# Altium PCB MODULAR_PCB.PcbDoc (part 2 of 2)
Units mil, origin at the board's own origin, x right, y up, seen from the top; angles counter-clockwise.
Board outline 3480 x 3849.93 mil, 2 copper layers (Top Layer, Bottom Layer); 170 components, 80 nets, 391 pads, 342 vias.
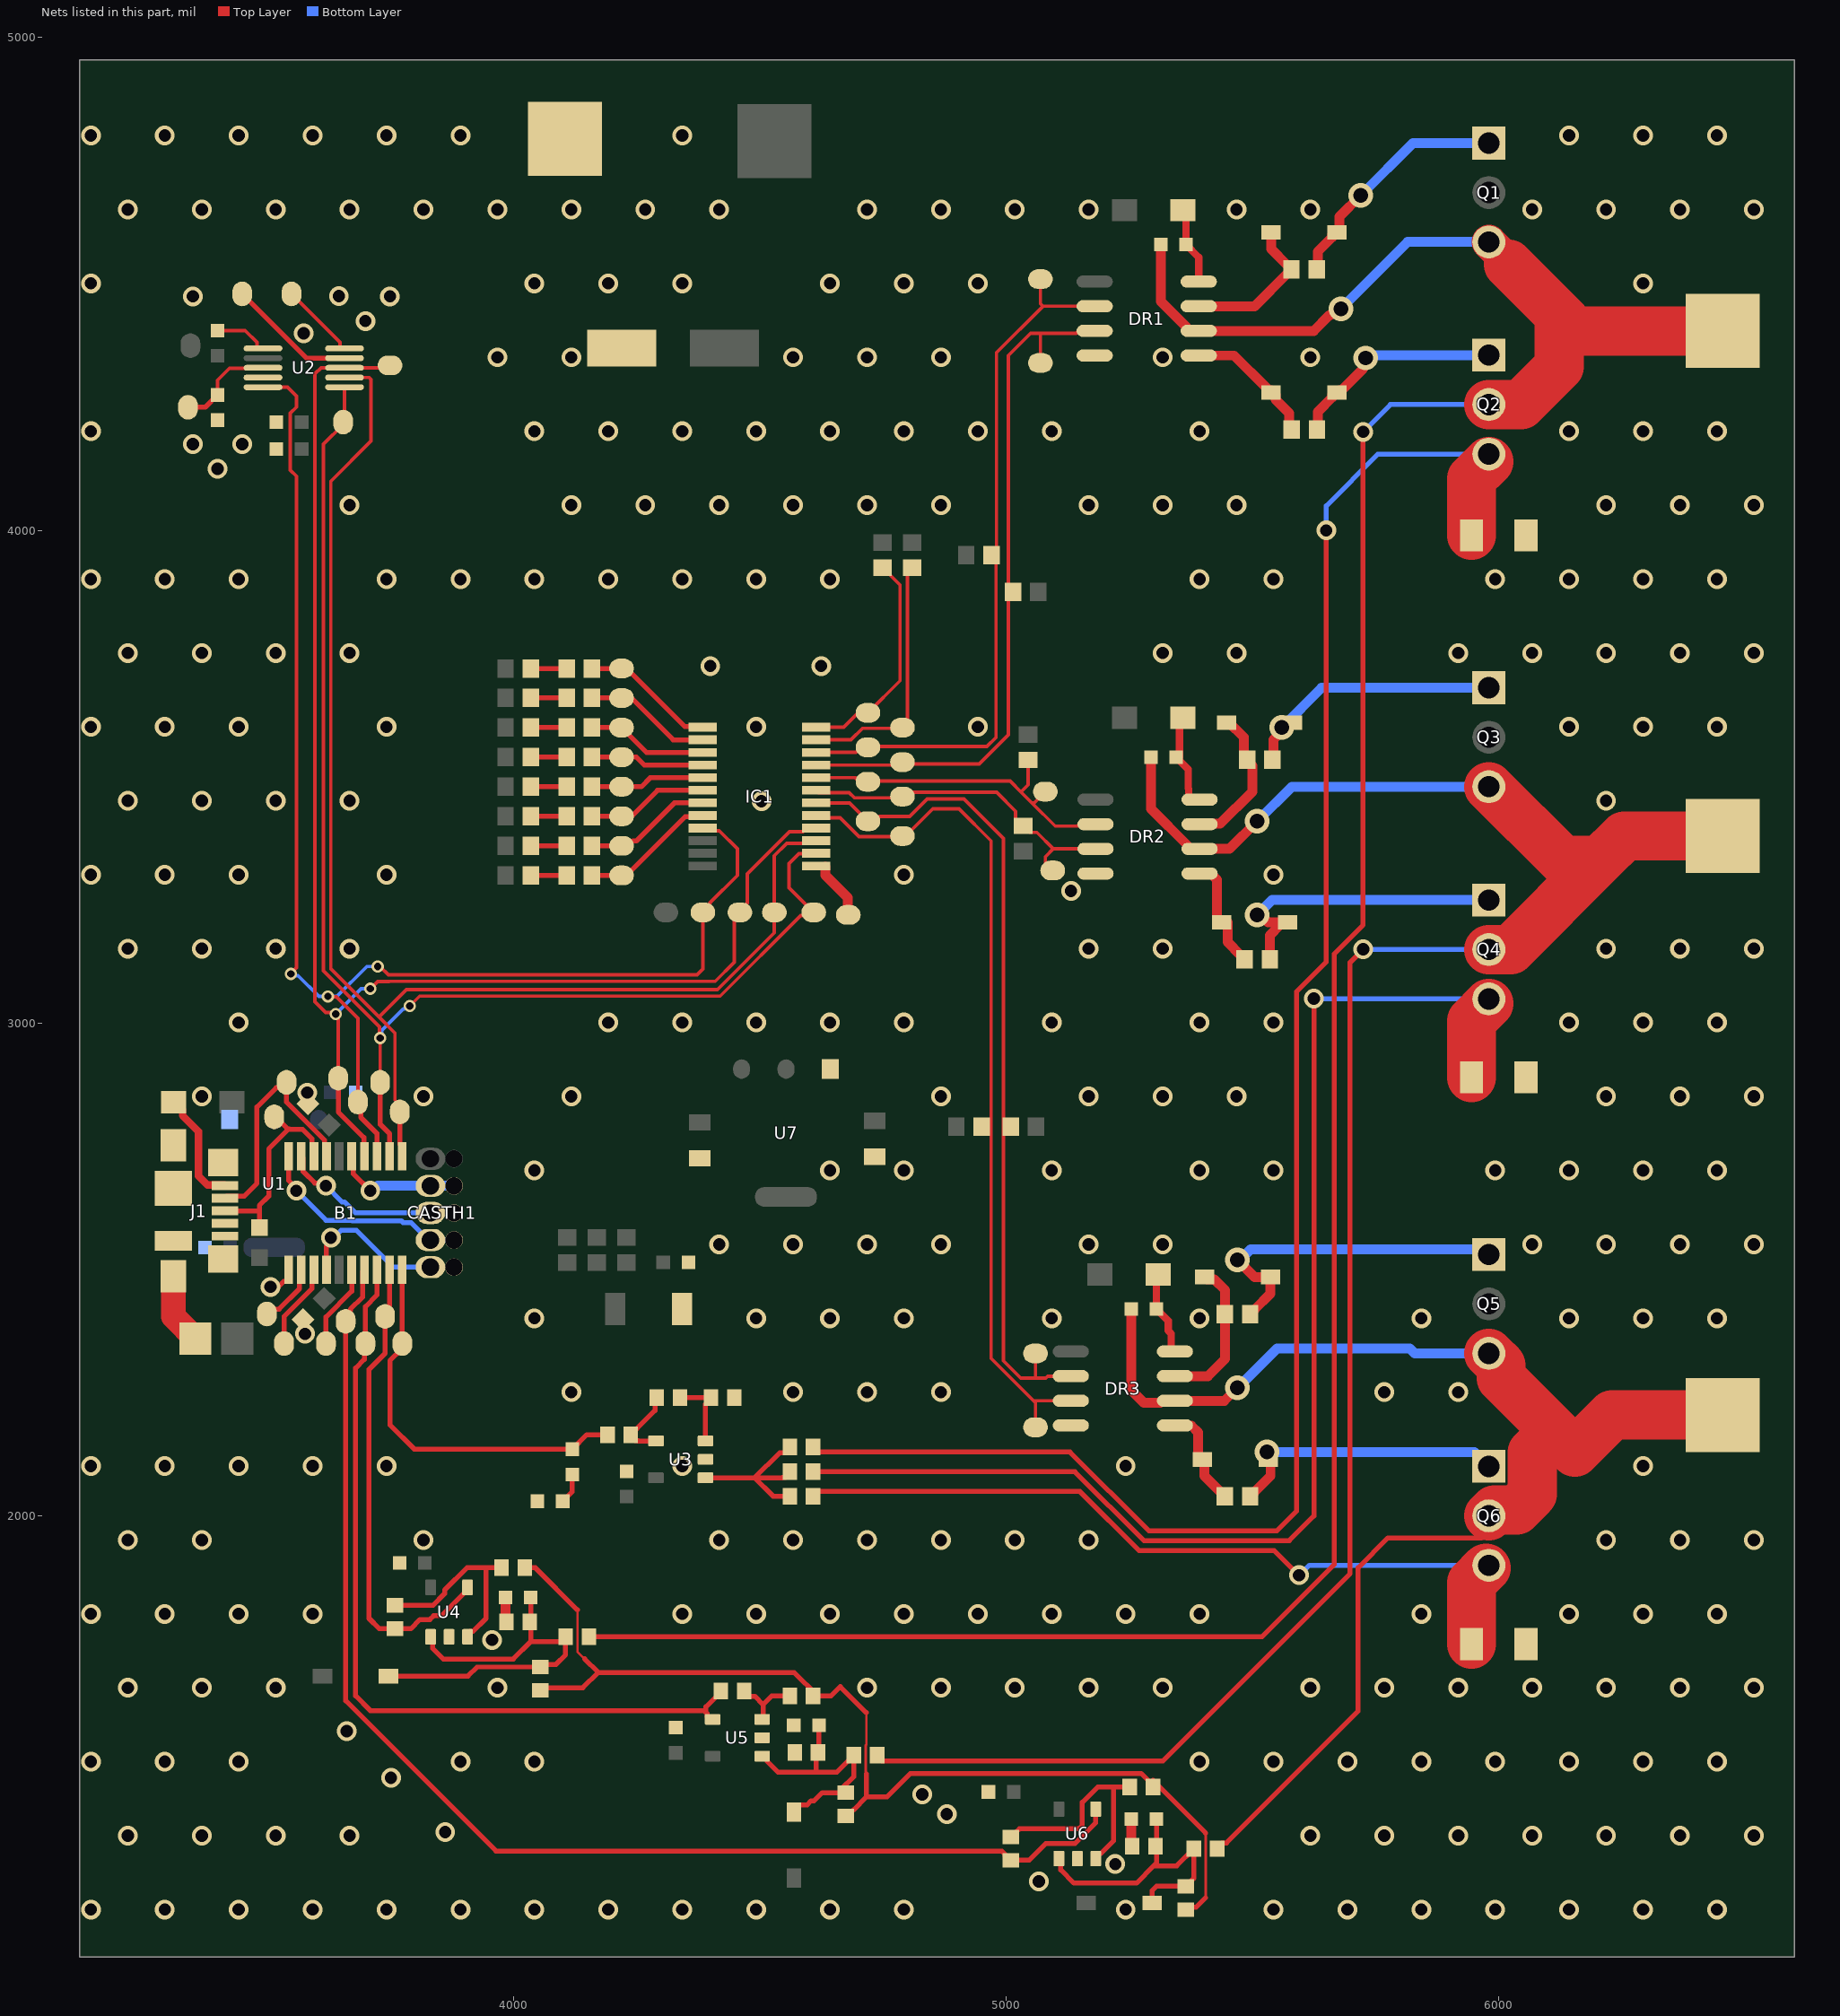
[diagram p2: the nets of this part, all layers, seen from the top]

## Via types
v1: diameter 40, hole 25, Top Layer to Bottom Layer, 300 vias
v2: diameter 50, hole 30, Top Layer to Bottom Layer, tented both sides, 22 vias
v3: diameter 40/40 (per signal layer), hole 25, Top Layer to Bottom Layer, tented both sides, 8 vias
v4: diameter 25/25 (per signal layer), hole 15, Top Layer to Bottom Layer, tented both sides, 7 vias
v5: diameter 40, hole 25, Top Layer to Bottom Layer, tented both sides, 5 vias

## Nets (pads, with @x,y where several pads share a name; then routed paths per layer and width w, separated by ;. In a path a pad name is that pad's centre, name@x,y a point inside that pad or via, vN(x,y) a via of type N, cw(c..) or ccw(c..) an arc to the next point about the centre after c; other vN are vias at no path point) (continued)
FSYNC: B1.14 IC1.4 TP8.1 TP16.1 TP47.1 U2.8 | length 3030
  Top Layer w7: v4@3636.29,3012.8 3640.56,3012.8 3645,3008.36 TP8.1@3645,2888.33 ; v4@3636.29,3015.05 v4(3639.74,3018.49) 3636.29,3021.94 3619.52,3021.94 3597.87,3043.59 3597.87,4317.87 3610,4330 TP16.1@3745,4330 ; v4(3710,3070) 3724.9,3084.9 3748,3084.9 3748.1,3085 4410,3085 4448.69,3123.69 4448.69,3213.69 TP47.1@4460,3225 4460,3228.93 4475,3243.93 4475,3303.38 4560.41,3388.79 4588.24,3388.79 4595.47,3396.02 IC1.4@4615.16,3396.02 ; TP16.1@3745,4330 TP16.1@3750,4335 TP16.1@3745,4330
  Top Layer w10: TP8.1@3645,2888.33 3645,2820 3697.01,2767.99 3697.01,2731.26 B1.14@3697.95,2730.32
  Bottom Layer w7: v4(3639.74,3018.49) 3691.36,3070.12 3709.88,3070.12 v4(3710,3070)
GND: B1.1 B1.15 C1.1 C2.1 C3.2 C4.2 C6.1 C7.2 C8.1 C9.1 C13.2 C15.1 C16.1 C17.2 C18.1 C19.2 C20.1 C21.2 C22.1 C23.1 C24.1 CASTH1.4 CP2.1 D3.1 DR1.4 DR2.4 DR3.4 IC1.1 J1.4 J1.5 J1.6 J1.7 J1.8 J1.9 J1.10 J1.11 R7.1 R26.1 R29.1 R30.2 R37.1 R41.1 R45.1 S_PAD2.1 TP19.1 TP20.1 U1.1 U2.4 U2.9 U3.2 U4.2 U5.2 U6.2 U7.1 | length 953.8
  Top Layer w10: TP20.1@3450,4480 3580.31,4349.69 U2.9@3657.68,4349.69 ; v3(3507.36,2465) 3509.19,2466.83 3524.94,2466.83 3534.57,2476.46 3540.55,2476.46 3544.41,2480.32 B1.1@3544.41,2500 ; B1.15@3672.36,2730.32 3675.33,2727.35 3675.33,2694.67 v3(3710,2660)
  Top Layer w20: C16.1@3984.41,1835 3984.41,1786.97 R37.1@3986.38,1785 ; IC1.1@4633.7,3318.11 4633.7,3300.71 4679.35,3255.06 4679.35,3220.65 TP19.1@4680,3220 ; C20.1@5254.41,1385 5254.41,1331.97 R45.1@5256.38,1330
  Top Layer w50: J1.11@3310.28,2486.54 3310.28,2404.72 CP2.1@3355,2360
  Bottom Layer w20: v3(3710,2660) 3715.41,2660 3725.41,2670 3845,2670 CASTH1.4@3880,2670
  other v1: 3143,1201.37 3293,1201.37 3443,1201.37 3593,1201.37 3743,1201.37 3893,1201.37 4043,1201.37 4193,1201.37 4343,1201.37 4493,1201.37 4643,1201.37 4793,1201.37 5243,1201.37 5543,1201.37 5693,1201.37 5843,1201.37 5993,1201.37 6143,1201.37 6293,1201.37 6443,1201.37 5067,1258.63 5222,1293.63 3218,1351.37 3368,1351.37 3518,1351.37 3668,1351.37 5618,1351.37 5768,1351.37 5918,1351.37 6068,1351.37 6218,1351.37 6368,1351.37 6518,1351.37 3862,1358.63 4880,1395 4830,1435 3752,1468.63 3143,1501.37 3293,1501.37 3443,1501.37 3893,1501.37 4043,1501.37 5393,1501.37 5543,1501.37 5693,1501.37 5843,1501.37 5993,1501.37 6143,1501.37 6293,1501.37 6443,1501.37 3662,1563.63 3218,1651.37 3368,1651.37 3518,1651.37 3968,1651.37 4718,1651.37 4868,1651.37 5018,1651.37 5168,1651.37 5318,1651.37 5618,1651.37 5768,1651.37 5918,1651.37 6068,1651.37 6218,1651.37 6368,1651.37 6518,1651.37 3957,1748.63 3143,1801.37 3293,1801.37 3443,1801.37 3593,1801.37 4343,1801.37 4493,1801.37 4643,1801.37 4793,1801.37 4943,1801.37 5093,1801.37 5243,1801.37 5393,1801.37 5843,1801.37 6143,1801.37 6293,1801.37 6443,1801.37 3218,1951.37 3368,1951.37 3818,1951.37 4418,1951.37 4568,1951.37 4718,1951.37 4868,1951.37 5018,1951.37 5168,1951.37 6218,1951.37 6368,1951.37 6518,1951.37 3143,2101.37 3293,2101.37 3443,2101.37 3593,2101.37 3743,2101.37 4343,2101.37 5243,2101.37 6293,2101.37 4118,2251.37 4568,2251.37 4718,2251.37 4868,2251.37 5768,2251.37 5918,2251.37 4043,2401.37 4493,2401.37 4643,2401.37 4793,2401.37 5093,2401.37 5393,2401.37 5843,2401.37 6143,2401.37 6293,2401.37 6443,2401.37 4418,2551.37 4568,2551.37 4718,2551.37 4868,2551.37 5168,2551.37 5318,2551.37 6068,2551.37 6218,2551.37 6368,2551.37 6518,2551.37 4043,2701.37 4643,2701.37 4793,2701.37 5093,2701.37 5393,2701.37 5543,2701.37 5993,2701.37 6143,2701.37 6293,2701.37 6443,2701.37 3368,2851.37 3818,2851.37 4118,2851.37 4868,2851.37 5168,2851.37 5318,2851.37 5468,2851.37 6218,2851.37 6368,2851.37 6518,2851.37 3443,3001.37 4193,3001.37 4343,3001.37 4493,3001.37 4643,3001.37 4793,3001.37 5093,3001.37 5393,3001.37 5543,3001.37 6143,3001.37 6293,3001.37 6443,3001.37 3218,3151.37 3368,3151.37 3518,3151.37 3668,3151.37 5168,3151.37 5318,3151.37 6218,3151.37 6368,3151.37 6518,3151.37 5132,3268.63 3143,3301.37 3293,3301.37 3443,3301.37 3743,3301.37 4793,3301.37 5543,3301.37 3218,3451.37 3368,3451.37 3518,3451.37 3668,3451.37 4503.88,3450.78 6218,3451.37 3143,3601.37 3293,3601.37 3443,3601.37 3743,3601.37 4493,3601.37 4943,3601.37 6143,3601.37 6293,3601.37 6443,3601.37 4400,3725 4625,3725 3218,3751.37 3368,3751.37 3518,3751.37 3668,3751.37 5318,3751.37 5468,3751.37 5918,3751.37 6068,3751.37 6218,3751.37 6368,3751.37 6518,3751.37 3143,3901.37 3293,3901.37 3443,3901.37 3743,3901.37 3893,3901.37 4043,3901.37 4193,3901.37 4343,3901.37 4493,3901.37 4643,3901.37 5393,3901.37 5543,3901.37 5993,3901.37 6143,3901.37 6293,3901.37 6443,3901.37 3668,4051.37 4118,4051.37 4268,4051.37 4418,4051.37 4568,4051.37 4718,4051.37 4868,4051.37 5168,4051.37 5318,4051.37 5468,4051.37 6218,4051.37 6368,4051.37 6518,4051.37 3400,4125 3350,4175 3450,4175 3143,4201.37 4043,4201.37 4193,4201.37 4343,4201.37 4493,4201.37 4643,4201.37 4793,4201.37 4943,4201.37 5093,4201.37 5393,4201.37 6143,4201.37 6293,4201.37 6443,4201.37 3968,4351.37 4118,4351.37 4568,4351.37 4718,4351.37 4868,4351.37 5318,4351.37 5618,4351.37 3575,4400 3700,4425 3350,4475 3750,4475 3646.25,4475.74 3143,4501.37 4043,4501.37 4193,4501.37 4343,4501.37 4643,4501.37 4793,4501.37 4943,4501.37 6293,4501.37 3218,4651.37 3368,4651.37 3518,4651.37 3668,4651.37 3818,4651.37 3968,4651.37 4118,4651.37 4268,4651.37 4418,4651.37 4718,4651.37 4868,4651.37 5018,4651.37 5168,4651.37 5468,4651.37 5618,4651.37 6068,4651.37 6218,4651.37 6368,4651.37 6518,4651.37 3143,4801.37 3293,4801.37 3443,4801.37 3593,4801.37 3743,4801.37 3893,4801.37 4343,4801.37 6143,4801.37 6293,4801.37 6443,4801.37
  other v3: 3577.5,2369.79 3582.18,2859.31
MCLK: B1.13 IC1.21 TP10.1 TP21.1 U2.5 | length 2890.4
  Top Layer w7: U2.5@3492.32,4290.63 3541.8,4290.63 3560,4272.43 3560,4250.4 3547.31,4237.71 3547.31,4122.69 3560,4110 3560,3113.1 3549,3102.1 v4(3549,3100) ; v4(3623.87,3054.36) 3624.75,3053.48 3641.52,3053.48 3685,3010 TP10.1@3685,2840 ; v4(3725,3115) 3729.87,3115 3746.87,3098 4373,3098 4385,3110 4385,3228.93 4399.57,3243.5 4399.57,3244.57 4455,3300 4455,3353.94 4418.15,3390.79 4390.07,3390.79 IC1.21@4384.84,3396.02
  Top Layer w10: TP10.1@3685,2840 3690.74,2834.26 3690.74,2809.26 3723.54,2776.46 B1.13@3723.54,2730.32
  Bottom Layer w7: v4(3549,3100) 3552.44,3096.56 3563.44,3096.56 3605.49,3054.51 3623.72,3054.51 v4(3623.87,3054.36) 3642.4,3054.36 3703.04,3115 v4(3725,3115)
NetB1_2: B1.2 TP1.1 | length 126.9
  Top Layer w10: TP1.1@3500.86,2410 3510.61,2419.75 3524.75,2419.75 3566.14,2461.14 3566.14,2496.14 B1.2@3570,2500
NetB1_3: B1.3 TP2.1 | length 175.1
  Top Layer w10: TP2.1@3535,2350 3535,2405 3591.73,2461.73 3591.73,2496.14 B1.3@3595.59,2500
NetB1_6: B1.6 TP4.1 | length 171.7
  Top Layer w10: TP4.1@3620,2350 3620,2403.84 3672.36,2456.2 B1.6@3672.36,2500
NetB1_7: B1.7 R47.2 TP6.1 U6.4 | length 2609.6
  Top Layer w10: B1.7@3697.95,2500 3694.09,2496.14 3694.09,2444.09 3669.75,2419.75 3669.75,2417.87 3660,2408.12 TP6.1@3660,2395 3660,1625 3965,1320 4991.38,1320 4998.27,1313.11 4998.27,1311.14 R47.2@5008.03,1301.38 ; R47.2@5010,1301.38 R47.2@5008.03,1301.38 ; U6.4@5182.4,1405.2 5182.4,1377.4 5140,1335 5080.87,1335 5047.24,1301.38 R47.2@5008.03,1301.38
NetB1_8: B1.8 R43.2 TP7.1 U5.4 | length 1690.6
  Top Layer w10: B1.8@3723.54,2500 3723.54,2448.54 3700,2425 TP7.1@3700,2350 3697.75,2347.75 3697.75,2317.75 3680,2300 3680,1635 3710,1605 4388.2,1605 4394.06,1599.14 ; U5.4@4404.8,1587.4 4399.88,1587.4 4394.06,1593.23 4394.06,1598.15 4391.13,1601.08 4391.13,1612.78 4421.38,1643.03 R43.2@4421.38,1645
NetB1_9: B1.9 R39.2 TP9.1 U4.4 | length 971.4
  Top Layer w10: B1.9@3749.13,2500 3749.13,2427.25 3740,2418.12 TP9.1@3740,2405 3740,2330 3707.27,2297.27 3707.27,1792.38 3728.27,1771.38 3792.06,1771.38 3810.7,1790.01 3831.03,1790.01 3838.57,1797.55 3854.68,1797.55 3907.4,1850.28 U4.4@3907.4,1855.2
NetB1_10: B1.10 C14.2 R34.2 TP11.1 | length 799.5
  Top Layer w10: B1.10@3774.72,2500 3774.72,2447.7 3775,2447.43 3775,2340 3750,2315 3750,2185 3799.41,2135.59 C14.2@4120,2135.59 4149.41,2165 R34.2@4191.38,2165
NetB1_17: B1.17 J1.2 TP5.1 | length 496.4
  Top Layer w10: J1.2@3415,2645 3418.86,2648.86 3453.86,2648.86 3480,2675 3480,2830 3519.26,2869.26 3529.26,2869.26 TP5.1@3540,2880 3540,2840 3617.32,2762.68 3617.32,2734.17 B1.17@3621.18,2730.32
NetB1_18: B1.18 J1.3 R1.1 TP3.1 | length 421
  Top Layer w10: J1.3@3415.87,2618.54 3485,2618.54 ; R1.1@3485,2585.51 3485,2618.54 ; TP3.1@3515,2810 3517.86,2810 3541.05,2786.81 ; 3544.82,2785.81 3504.03,2745.01 3504.03,2649.03 3485,2630 3485,2618.54 ; 3545.53,2785.1 3572.27,2785.1 3592.02,2765.36 3592.02,2733.89 B1.18@3595.59,2730.32
NetB1_19: B1.19 CASTH1.3 | length 325.8
  Top Layer w10: B1.19@3570,2730.32 3573.86,2726.46 3573.86,2699.09 3597.21,2675.74 3614.26,2675.74 v3(3620,2670)
  Bottom Layer w10: v3(3620,2670) 3652.4,2637.6 3657.4,2637.6 3680,2615 CASTH1.3@3832,2615
NetB1_20: B1.20 CASTH1.2 | length 438.2
  Top Layer w10: B1.20@3544.41,2730.32 3544.41,2680.86 3560,2665.27 v3(3560,2660)
  Bottom Layer w10: v3(3560,2660) 3620,2600 3672.37,2600 3673.37,2599 3772.8,2599 3776.8,2595 3793.03,2595 3828.03,2560 CASTH1.2@3832,2560 CASTH1.2@3880,2560
NetC5_1: C5.1 U2.1 | length 113.2
  Top Layer w7: C5.1@3400,4405.59 3456.1,4405.59 3480.02,4381.68 3480.02,4371.59 3482.24,4369.37 U2.1@3492.32,4369.37
NetC8_2: C8.2 TP22.1 U2.3 | length 203
  Top Layer w7: C8.2@3400,4275 3400,4305 3424.08,4329.08 3491.4,4329.08 U2.3@3492.32,4330
  Top Layer w10: TP22.1@3340,4250 3375,4250 C8.2@3400,4275
NetC10_2: C10.2 D5.2 DR1.8 | length 158.3
  Top Layer w15: D5.2@5359.06,4650 5365.59,4643.46 C10.2@5365.59,4580 5391.22,4554.37 DR1.8@5391.22,4505
NetC11_1: C11.1 D7.2 DR2.8 | length 198.7
  Top Layer w15: C11.1@5345.59,3540 5370,3515.59 5370,3476.81 5371.1,3475.71 5371.1,3458.41 5375.63,3453.88 DR2.8@5392.93,3453.88 ; C11.1@5352.13,3540 5352.13,3613.08 D7.2@5359.06,3620
NetC12_2: C12.2 D17.2 DR3.8 | length 174.7
  Top Layer w15: D17.2@5309.06,2490 5305.59,2486.54 C12.2@5305.59,2420 5329.37,2396.22 5329.37,2376.22 5335.58,2370.01 5335.58,2360.01 5335.6,2338.41 5340.12,2333.88 DR3.8@5342.93,2333.88
NetC14_1: C14.1 C15.2 | length 62.4
  Top Layer w10: C15.2@4100.59,2030 4120,2049.41 C14.1@4120,2084.41
NetC16_2: C16.2 D20.1 R36.2 R37.2 R50.2 U4.1 | length 828.8
  Top Layer w10: D20.1@3746.93,1675 3908.13,1675 3926.75,1693.62 R50.2@4055,1693.62 4060,1698.62 4086.73,1698.62 4106.38,1718.27 R36.2@4106.38,1755 4106.38,1754.76 4096.61,1745 4035,1745 ; U4.1@3832.6,1754.8 3836.25,1751.15 3836.25,1731.81 3858.06,1710 4000,1710 4035,1745 ; R37.2@4033.62,1785 R37.2@4035.59,1785 ; C16.2@4035.59,1835 R37.2@4035.59,1785 ; 4035,1745 4035.59,1745.59 R37.2@4035.59,1785
NetC18_2: C18.2 D21.1 R40.2 R41.2 R49.2 U5.1 | length 516.2
  Top Layer w10: U5.1@4505.2,1512.6 4510.12,1512.6 4515.94,1506.77 4515.94,1501.85 4537.8,1480 4615,1480 ; D21.1@4570,1398.86 4570,1403.78 4579.76,1413.54 4596.38,1413.54 4604.76,1421.93 4610.55,1421.93 4627.24,1438.62 4663.27,1438.62 4665.83,1441.18 4665.83,1445.83 4691.38,1471.38 R40.2@4691.38,1515 4691.38,1513.03 4681.61,1503.27 4679.65,1503.27 4656.38,1480 4615,1480 ; C18.2@4620.59,1575 4620.59,1521.97 R41.2@4618.62,1520 4615,1516.38 4615,1480
NetC20_2: C20.2 D22.1 R44.2 R45.2 R48.2 U6.1 | length 613
  Top Layer w10: U6.1@5107.6,1304.8 5111.25,1301.15 5111.25,1281.81 5138.06,1255 5265,1255 5300,1290 ; D22.1@5296.93,1215 5296.93,1240 5305.55,1248.62 R48.2@5365,1248.62 5366.97,1248.62 5376.73,1258.39 5376.73,1260.35 5381.38,1265 R44.2@5381.38,1325 5346.38,1290 5300,1290 ; C20.2@5305.59,1385 5305.59,1330 5305.59,1295.59 5300,1290
NetD1_1: D1.1 J1.1 | length 234.3
  Top Layer w15: D1.1@3310.94,2840 3313.9,2840 3329.04,2824.86 3329.04,2812.81 3361.18,2780.67 3361.18,2690.16 3379.39,2671.95 3413.64,2671.95 J1.1@3415,2670.59
NetD2_1: D2.1 Q1.1 R5.2 | length 494
  Top Layer w20: R5.2@5630.59,4530 5632.69,4532.1 5632.69,4565.76 5662.24,4595.31 5662.24,4600.24 5667.01,4605 D2.1@5671.93,4605 5672.14,4605 5676.9,4609.76 5676.9,4636.9 v2(5720,4680)
  Bottom Layer w20: v2(5720,4680) 5826.18,4786.18 Q1.1@5980,4786.18
NetD2_2: D2.2 DR1.7 R5.1 | length 300.2
  Top Layer w20: DR1.7@5391.22,4455 5504.41,4455 R5.1@5570.71,4521.3 ; D2.2@5538.07,4605 5538.07,4571.34 5570.71,4538.7 5572.68,4538.7 5579.41,4531.97 R5.1@5579.41,4530
NetD4_1: D4.1 Q2.1 R6.2 | length 450.8
  Top Layer w20: R6.2@5631.18,4205 5632.98,4206.8 5632.98,4241.06 5662.24,4270.31 5662.24,4275.24 5667.01,4280 D4.1@5671.93,4280 5676.69,4284.76 D4.1@5681.61,4284.76 ; D4.1@5676.85,4280 D4.1@5681.61,4284.76 ; v2(5730,4350) 5724.26,4344.26 5724.26,4327.41 D4.1@5681.61,4284.76
  Bottom Layer w20: v2(5730,4350) 5735.79,4355.79 Q2.1@5980,4355.79
NetD4_2: D4.2 DR1.5 R6.1 | length 276.1
  Top Layer w20: DR1.5@5391.22,4355 5463.07,4355 5528.39,4289.69 5528.39,4284.76 5538.23,4284.76 5547.76,4275.24 5547.76,4265.39 5575.15,4238 5575.15,4209.85 R6.1@5580,4205
NetD6_1: D6.1 Q3.1 R8.2 | length 548.5
  Top Layer w20: R8.2@5540.59,3535 5542.69,3537.1 5542.69,3575.68 5563.5,3596.5 5577.01,3610 D6.1@5581.93,3610
  Bottom Layer w20: v2(5560,3600) 5640.79,3680.79 Q3.1@5980,3680.79
NetD6_2: D6.2 DR2.7 R8.1 | length 298.8
  Top Layer w20: DR2.7@5392.93,3403.88 5393.85,3404.8 5434.8,3404.8 5500,3470 5500,3522.44 5489.41,3533.03 R8.1@5489.41,3535 5482.68,3541.73 5482.68,3580.32 5452.99,3610 D6.2@5448.07,3610
NetD8_1: D8.1 Q4.1 R17.2 | length 629.7
  Top Layer w20: v2(5510,3220) 5517.24,3220 5532.24,3205 D8.1@5571.93,3205 ; R17.2@5535.59,3130 5535.59,3178.7 D8.1@5557.13,3200.24
  Bottom Layer w20: v2(5510,3220) 5540,3250 Q4.1@5980,3250
NetD8_2: D8.2 DR2.5 R17.1 | length 236.3
  Top Layer w20: DR2.5@5392.93,3303.88 5415.94,3303.88 5428.39,3291.44 5428.39,3209.76 5433.15,3205 5450,3205 5450,3164.41 5475.71,3138.7 5477.68,3138.7 5484.41,3131.97 R17.1@5484.41,3130
NetD9_1: D9.1 R9.1 | length 73.2
  Top Layer w10: R9.1@4035.59,3300 D9.1@4108.82,3300
NetD9_2: D9.2 IC1.20 TP28.1 | length 275.2
  Top Layer w10: D9.2@4160,3300 4230,3300 4348.92,3418.92 4382.15,3418.92 IC1.20@4384.84,3421.61
NetD10_1: D10.1 R10.1 | length 73.2
  Top Layer w10: R10.1@4035.59,3360 D10.1@4108.82,3360
NetD10_2: D10.2 IC1.19 TP30.1 | length 261
  Top Layer w10: D10.2@4160,3360 4233.12,3360 4243.12,3370 4250,3370 4327.2,3447.2 IC1.19@4384.84,3447.2
NetD11_1: D11.1 R11.1 | length 73.2
  Top Layer w10: R11.1@4035.59,3420 D11.1@4108.82,3420
NetD11_2: D11.2 IC1.18 TP32.1 | length 246.7
  Top Layer w10: D11.2@4160,3420 4240,3420 4292.8,3472.8 IC1.18@4384.84,3472.8
NetD12_1: D12.1 R12.1 | length 73.2
  Top Layer w10: R12.1@4035.59,3480 D12.1@4108.82,3480
NetD12_2: D12.2 IC1.17 TP34.1 | length 232.5
  Top Layer w10: D12.2@4160,3480 4260,3480 4278.39,3498.39 IC1.17@4384.84,3498.39
NetD13_1: D13.1 R13.1 | length 73.2
  Top Layer w10: R13.1@4035.59,3540 D13.1@4108.82,3540
NetD13_2: D13.2 IC1.16 TP37.1 | length 231.5
  Top Layer w10: D13.2@4160,3540 4250,3540 4266.02,3523.98 IC1.16@4384.84,3523.98
NetD14_1: D14.1 R14.1 | length 73.2
  Top Layer w10: R14.1@4035.59,3600 D14.1@4108.82,3600
NetD14_2: D14.2 IC1.15 TP40.1 | length 245.7
  Top Layer w10: D14.2@4160,3600 TP40.1@4220,3600 4270.43,3549.57 IC1.15@4384.84,3549.57
NetD15_1: D15.1 R15.1 | length 73.2
  Top Layer w10: R15.1@4035.59,3660 D15.1@4108.82,3660
NetD15_2: D15.2 IC1.14 TP42.1 | length 260
  Top Layer w10: D15.2@4160,3660 4240,3660 4324.84,3575.16 IC1.14@4384.84,3575.16
NetD16_1: D16.1 R16.1 | length 73.2
  Top Layer w10: R16.1@4035.59,3720 D16.1@4108.82,3720
NetD16_2: D16.2 IC1.13 TP44.1 | length 274.2
  Top Layer w10: D16.2@4160,3720 4230,3720 4347.74,3602.26 4383.33,3602.26 IC1.13@4384.84,3600.75
NetD18_1: D18.1 Q5.1 R27.2 | length 697.5
  Top Layer w20: v2(5470,2520) 5505,2485 D18.1@5536.93,2485 5536.93,2451.34 5504.29,2418.7 5502.32,2418.7 5495.59,2411.97 R27.2@5495.59,2410
  Bottom Layer w20: v2(5470,2520) 5475.93,2520 5496.72,2540.79 5970,2540.79 Q5.1@5980,2530.79
NetD18_2: D18.2 DR3.7 R27.1 | length 308.2
  Top Layer w20: DR3.7@5342.93,2283.88 5409.65,2283.88 5444.41,2318.64 5444.41,2458.7 5422.87,2480.24 5407.83,2480.24 D18.2@5403.07,2485
NetD19_1: D19.1 Q6.1 R28.2 | length 556.8
  Top Layer w20: R28.2@5495.59,2040 5495.59,2041.97 5502.32,2048.7 5504.29,2048.7 5537.02,2081.43 5537.02,2109.98 D19.1@5532.53,2114.48
  Bottom Layer w20: v2(5530,2130) 5950.79,2130 Q6.1@5980,2100.79
NetD19_2: D19.2 DR3.5 R28.1 | length 208.7
  Top Layer w20: DR3.5@5342.93,2183.88 5343.85,2182.96 5376.8,2182.96 5390,2169.76 5390,2119.24 5394.76,2114.48 D19.2@5398.67,2114.48 5402.74,2110.41 5402.74,2081.67 5435.71,2048.7 5437.68,2048.7 5444.41,2041.97 R28.1@5444.41,2040
NetIC1_11: IC1.11 R24.1 TP41.1 | length 517.8
  Top Layer w7: IC1.11@4615.16,3575.16 4685.61,3575.16 4708.95,3598.5 4788.5,3598.5 4800,3610 4800,3914.41 R24.1@4810,3924.41
NetIC1_12: IC1.12 R25.1 TP43.1 | length 432.8
  Top Layer w7: IC1.12@4615.16,3600.75 4670.75,3600.75 TP43.1@4700,3630 ; TP43.1@4720,3630 4785,3695 4785,3889.41 R25.1@4750,3924.41
NetQ2_3: Q2.3 R7.2 R32.1 | length 3671.4
  Top Layer w10: R32.1@4608.62,2140 4608.62,2139.76 4618.39,2130 5130,2130 5290,1970 5550,1970 5590,2010 5590,3064.5 5650,3124.5 v5(5650,4000)
  Top Layer w100: R7.2@5944.88,3990 5944.88,4104.88 Q2.3@5980,4140
  Bottom Layer w10: v5(5650,4000) 5650,4050 5755,4155 Q2.3@5980,4155
NetQ4_3: Q4.3 R26.2 R33.1 | length 2666.9
  Top Layer w10: R33.1@4608.62,2090 5140,2090 5280,1950 5575,1950 5625,2000 v5@5625,3045.32 ; v5(5625,3050) v5@5629.68,3045.32
  Top Layer w100: R26.2@5944.88,2890 5944.88,3004.88 Q4.3@5980,3040
  Bottom Layer w10: v5(5625,3050) 5625.79,3049.21 Q4.3@5980,3049.21
NetQ6_3: Q6.3 R29.2 R35.1 | length 1621
  Top Layer w10: R35.1@4608.62,2040 4608.62,2040.24 4618.39,2050 5150,2050 5270,1930 5544.14,1930 5594.14,1880 v5(5595,1880)
  Top Layer w100: R29.2@5944.88,1740 5944.88,1864.88 Q6.3@5974.39,1894.39
  Bottom Layer w10: v5(5595,1880) 5595.86,1880 5615.86,1900 Q6.3@5980,1900
NetR30_1: R30.1 R31.1 U3.3 | length 155
  Top Layer w10: R31.1@4338.62,2240 R30.1@4401.38,2240 4401.38,2238.03 4390.2,2226.85 U3.3@4390.2,2152.4
NetR31_2: R31.2 R34.1 U3.4 | length 155.6
  Top Layer w10: U3.4@4289.8,2152.4 4254.24,2152.4 4253.38,2153.27 4248.39,2153.27 4238.62,2163.03 R34.1@4238.62,2165 4238.62,2166.97 4248.39,2176.73 4250.35,2176.73 4287.75,2214.13 4287.75,2236.37 R31.2@4291.38,2240
NetR32_2: R32.2 R33.2 R35.2 U3.1 | length 362.8
  Top Layer w10: U3.1@4390.2,2077.6 4490,2077.6 ; R35.2@4561.38,2040 4527.6,2040 4490,2077.6 ; R33.2@4561.38,2090 4561.38,2088.03 4551.61,2078.27 4546.43,2078.27 4545.76,2077.6 4490,2077.6 ; R32.2@4561.38,2140 4561.38,2138.03 4551.61,2128.27 4540.67,2128.27 4490,2077.6
NetR38_1: R38.1 R42.1 R46.1 R48.1 R49.1 R50.1 | length 2243.4
  Top Layer w5: 4130.36,1809.64 4130.36,1724.64 4144.95,1710.05 ; R49.1@4675,1391.38 4687.26,1403.64 R49.1@4690.61,1403.64 ; 4716.77,1476.77 4715.36,1478.18 4715.36,1535.25 4716.77,1536.67 4716.77,1600.93 ; 5286.36,1467.08 5286.36,1464.23 5287.15,1463.44 5298.62,1463.44 R46.1@5298.62,1450 ; R48.1@5365,1201.38 5369.65,1196.72 5371.38,1195 5371.38,1198.45 R48.1@5379.23,1206.3 ; 5405.36,1225.36 5405.36,1356.7 ; R42.1@4608.62,1635 4618.62,1625 R42.1@4608.62,1635
  Top Layer w10: R38.1@4023.62,1895 4045,1895 4130.36,1809.64 ; R50.1@4055,1646.38 4060,1651.38 4141.38,1651.38 4172.5,1682.5 ; 4144.95,1710.05 4172.5,1682.5 ; R42.1@4608.62,1635 R42.1@4617.7,1635 ; R49.1@4690.61,1403.64 4716.77,1429.8 ; 4716.77,1476.77 4716.77,1429.8 ; 4716.77,1600.93 4663.85,1653.85 4645,1635 4631.35,1635 R42.1@4617.7,1635 ; R46.1@5286.36,1465.66 5274.28,1477.73 4806.37,1477.73 4758.45,1429.8 4716.77,1429.8 ; R46.1@5298.62,1463.44 5405.36,1356.7 ; R48.1@5379.23,1206.3 5386.3,1206.3 5405.36,1225.36 ; 4172.5,1682.5 4570.2,1682.5 R42.1@4617.7,1635
NetR38_2: R38.2 R39.1 U4.3 | length 412.4
  Top Layer w10: R39.1@3760,1818.62 3837.01,1818.62 3861.08,1842.69 3861.08,1849.86 3906.22,1895 3941.3,1895 ; U4.3@3907.4,1754.8 3907.4,1759.72 3913.23,1765.55 3918.15,1765.55 3945,1792.4 3945,1891.3 3941.3,1895 ; R38.2@3976.38,1895 3941.3,1895
NetR42_2: R42.2 R43.1 U5.3 | length 143
  Top Layer w10: R43.1@4468.62,1645 4468.62,1643.97 4478.39,1634.2 4490.54,1634.2 4507.37,1617.37 ; U5.3@4505.2,1587.4 4507.37,1589.58 4507.37,1617.37 ; R42.2@4561.38,1635 4525,1635 4507.37,1617.37
NetR46_2: R46.2 R47.1 U6.3 | length 474
  Top Layer w10: R47.1@5010,1348.62 5011.97,1348.62 5021.73,1358.39 5021.73,1359.14 5027.59,1365 5147.37,1365 5155,1372.63 5155,1418.78 5186.22,1450 5218.8,1450 ; U6.3@5182.4,1304.8 5182.4,1309.72 5188.23,1315.55 5193.15,1315.55 5218.8,1341.2 5218.8,1450 ; R46.2@5251.38,1450 5218.8,1450
NetTP14_1: TP14.1 U2.10 | length 159.4
  Top Layer w7: TP14.1@3550,4480 3648.32,4381.68 3648.32,4371.59 3650.55,4369.37 U2.10@3657.68,4369.37
OUT0: DR3.3 IC1.5 R18.1 TP27.1 TP38.1 | length 1725.9
  Top Layer w7: IC1.5@4615.16,3421.61 4620.17,3416.6 4663.4,3416.6 4701.5,3378.5 4788.5,3378.5 TP27.1@4790,3380 4796.65,3380 4851.65,3435 4905,3435 4970,3370 4970,2320 5056.12,2233.88 ; TP38.1@5060,2180 5060,2230 5056.12,2233.88 ; DR3.3@5131.71,2233.88 5056.12,2233.88
OUT1: DR3.2 IC1.6 R19.1 TP29.1 TP35.1 | length 1718.6
  Top Layer w7: IC1.6@4615.16,3447.2 4682.8,3447.2 4707.5,3422.5 4727.23,3422.5 TP29.1@4729.86,3419.86 ; TP29.1@4720,3410 TP29.1@4729.86,3419.86 ; TP35.1@5060,2330 5060,2280 ; DR3.2@5131.71,2283.88 5131.33,2283.5 5084.5,2283.5 5081,2280 5060,2280 ; TP29.1@4729.86,3419.86 4732.2,3419.86 4735.75,3416.31 4740.24,3416.31 4743.79,3419.86 4804.86,3419.86 4840,3455 4915,3455 4995,3375 4995,2315 5030,2280 5060,2280
OUT2: DR2.3 IC1.7 R20.1 TP26.1 TP31.1 | length 685.7
  Top Layer w7: IC1.7@4615.16,3472.8 4619.98,3467.98 4682.02,3467.98 4692.53,3457.47 4786.44,3457.47 TP31.1@4789.49,3460.51 ; TP31.1@4790,3460 4797.8,3467.8 4797.8,3468.82 4981.18,3468.82 5019.8,3430.2 5019.8,3413.82 5033.03,3400.59 R20.1@5035,3400.59 5048.23,3387.36 5062.64,3387.36 5096.12,3353.88 ; TP26.1@5080,3310 5080,3337.76 5096.12,3353.88 ; DR2.3@5181.71,3353.88 5096.12,3353.88
OUT3: DR2.2 IC1.8 R21.1 TP25.1 TP33.1 | length 714.2
  Top Layer w7: IC1.8@4615.16,3498.39 4694.4,3498.39 4696.47,3496.31 4713.69,3496.31 TP33.1@4720,3490 ; TP33.1@4723,3491.5 5008.5,3491.5 5030.65,3469.35 ; R21.1@5045,3534.41 5045,3483.7 5030.65,3469.35 ; TP25.1@5080,3470 5057.2,3447.2 5052.8,3447.2 ; DR2.2@5181.71,3403.88 5178.31,3400.47 5144.87,3400.47 5144.4,3400 5100,3400 5052.8,3447.2 ; 5030.65,3469.35 5052.8,3447.2
OUT4: DR1.3 IC1.9 R22.1 TP24.1 TP36.1 | length 1452.5
  Top Layer w7: IC1.9@4615.16,3523.98 4787.89,3523.98 TP36.1@4790,3526.08 ; TP36.1@4790,3530 TP36.1@4790,3526.08 ; TP24.1@5070,4340 5070,4400 ; DR1.3@5180,4405 5176.59,4401.59 5144.28,4401.59 5142.69,4400 5070,4400 ; TP36.1@4790,3526.08 4946.08,3526.08 5005,3585 5005,3865.59 R22.1@5014.41,3875 5005,3884.41 5005,4355 5050,4400 5070,4400
OUT5: DR1.2 IC1.10 R23.1 TP23.1 TP39.1 | length 1447.5
  Top Layer w7: IC1.10@4615.31,3549.72 4695.79,3549.72 TP39.1@4706.07,3560 ; TP39.1@4720,3560 4721.5,3561.5 4961.5,3561.5 4980,3580 4980,3938.82 4970.59,3948.23 R23.1@4970.59,3950 4980.89,3960.3 4980.89,4360.89 5075,4455 ; TP23.1@5070,4510 5070,4460 5075,4455 ; DR1.2@5180,4455 5075,4455
OUT_A: C10.1 DR1.6 Q1.3 Q2.2 R36.1 S_PAD3.1 | length 5889.7
  Top Layer w10: R36.1@4153.62,1755 5519.5,1755 5666,1901.5 5666,3140.5 5725,3199.5 v5(5725,4200)
  Top Layer w20: C10.1@5314.41,4580 5314.41,4464.51 5365.99,4412.92 5365.99,4407.22 5368.21,4405 DR1.6@5391.22,4405 5625,4405 5656.11,4436.11 5657.99,4436.11 5671.88,4450 v2(5680,4450)
  Top Layer w70: Q1.3@5980,4585.39 6020,4545.39 6020,4540
  Top Layer w100: Q2.2@5980,4255.39 6045.39,4255.39 6123.04,4333.04 6123.04,4436.96 ; 6020,4540 6123.04,4436.96 ; S_PAD3.1@6455,4405 6155,4405 6123.04,4436.96
  Bottom Layer w10: v5(5725,4200) 5780.39,4255.39 Q2.2@5980,4255.39
  Bottom Layer w20: v2(5680,4450) 5815.39,4585.39 Q1.3@5980,4585.39
OUT_B: C11.2 DR2.6 Q3.3 Q4.2 R40.1 S_PAD4.1 | length 4393.3
  Top Layer w10: R40.1@4738.62,1515 4738.62,1513.03 4748.39,1503.27 5318.6,1503.27 5698.33,1882.99 5698.33,3123.33 v5(5725,3150)
  Top Layer w20: C11.2@5294.41,3540 5294.41,3435.1 5367.7,3361.8 5367.7,3356.1 5369.92,3353.88 DR2.6@5392.93,3353.88 5453.88,3353.88 v2(5510,3410)
  Top Layer w100: Q4.2@5980,3149.61 6024.32,3149.61 6204.86,3330.14 ; Q3.3@5980,3480 6129.86,3330.14 6204.86,3330.14 ; S_PAD4.1@6455,3380 6254.71,3380 6204.86,3330.14
  Bottom Layer w10: v5(5725,3150) 5725.39,3149.61 Q4.2@5980,3149.61
  Bottom Layer w20: v2(5510,3410) 5580,3480 Q3.3@5980,3480
OUT_C: C12.1 DR3.6 Q5.3 Q6.2 R44.1 S_PAD5.1 | length 2826.9
  Top Layer w10: R44.1@5428.62,1325 5428.62,1326.97 5438.39,1336.73 5447.6,1336.73 5715,1604.13 5715,1895 5775.39,1955.39 5964.75,1955.39 5970.6,1961.25 5970.6,1991 Q6.2@5980,2000.39
  Top Layer w20: C12.1@5254.41,2420 5254.41,2255.59 5280,2230 5313.44,2230 5317.32,2233.88 DR3.6@5342.93,2233.88 5443.28,2233.88 5469.4,2260 v2(5470,2260)
  Top Layer w100: Q6.2@5980,2000.39 5991.93,2012.32 6036.25,2012.32 6068.46,2044.54 6068.46,2128.46 6112.5,2172.5 ; Q5.3@5980,2330 5984.61,2325.39 6005,2305 6005,2280 6112.5,2172.5 ; S_PAD5.1@6455,2205 6230,2205 6155,2130 6112.5,2172.5
  Bottom Layer w20: v2(5470,2260) 5550,2340 5820.07,2340 5830.07,2330 Q5.3@5980,2330
RST: B1.4 CASTH1.1 | length 307.9
  Top Layer w10: B1.4@3621.18,2500 3621.18,2548.06 3630,2556.88 v3(3630,2565)
  Bottom Layer w10: v3(3630,2565) 3635.86,2565 3650.86,2580 3681.62,2580 3756.62,2505 CASTH1.1@3832,2505
SCLK: B1.11 IC1.3 TP13.1 TP17.1 U2.7 | length 2851.2
  Top Layer w7: U2.7@3659.51,4310.31 3707.55,4310.31 3711.65,4306.21 3711.65,4181.65 3630,4100 3630,3110 3727.5,3012.5 ; TP13.1@3770,2820 3770,2833.93 3760,2843.93 3760,2980 3727.5,3012.5 ; IC1.3@4615.16,3370.43 4609.93,3365.2 4555.2,3365.2 4530,3340 TP17.1@4530,3225 4530,3183.38 4414.62,3068 3783,3068 3727.5,3012.5
  Top Layer w10: TP13.1@3770,2820 3770,2754.72 3774.72,2750 B1.11@3774.72,2730.32
SDATA: B1.12 IC1.2 TP12.1 TP18.1 TP46.1 U2.6 | length 2811.2
  Top Layer w7: U2.6@3657.68,4290.63 3657.68,4215.28 3655.28,4215.28 3615,4175 3615,3106.62 3728.62,2993 3728.62,2971.38 v4(3730,2970) TP12.1@3730,2880 ; v4(3790,3035) 3810,3055 4420,3055 4583.69,3218.69 4603.69,3218.69 TP46.1@4610,3225 4560,3275 4560,3324.12 4579.99,3344.11 4614.43,3344.11 IC1.2@4615.16,3344.84
  Top Layer w10: TP12.1@3730,2880 3730,2794.76 3749.13,2775.62 B1.12@3749.13,2730.32
  Bottom Layer w7: v4(3730,2970) 3733.22,2973.22 3733.22,2985.31 3737.91,2990 3737.98,2990 3777.23,3029.25 3779.38,3029.25 3785.13,3035 v4(3790,3035)
pads on no net: IC1.22 IC1.23 U1.2

## Polygon pours and split planes (outlines as drawn)
GND on Top Layer "NONET_L-01_P-001" (solid, remove dead copper, pour order 5): 3120,4955 6600,4955 6600,1105.07 3120,1105.07
GND on Top Layer "GND_L01_P003" (solid, remove dead copper, pour order 3): 3244.28,2315 3244.28,2915 3894.28,2915 3894.28,2315
no net on Mechanical 1 "NONET_L-01_P-001" (none): 4565,3115 4565,3175 4835,3175 4835,3385 4910,3385 4910,3115
GND on Bottom Layer "NONET_L-01_P-001" (solid, remove dead copper, pour order 8): 3122.28,4954.93 6602.28,4954.93 6602.28,1105 3122.28,1105
GND on Bottom Layer "GND_L02_P001" (solid, pour order 1): 3255,2315 3255,2915 3895,2915 3895,2315

## Keep-outs
Keep-Out Layer:
  circle w10: c3560,2260 r36.06
  circle w10: c3560,2970 r36.06
  lines w15: 3885,3115 3850,3115 ; 3225,4065 3225,4600 3300,4600 3300,4065 3225,4065 ; 3225,4065 3505,4065 3505,3990 3225,3990 3225,4065 ; 3850,3115 3850,3850 4755,3850 4755,3775 3945,3775 3945,3175 4350,3175 4350,3115 3850,3115 ; 3260,4525 3860,4525 3860,4600 3260,4600 3260,4525 ; 3800,4070 3800,4600 3875,4600 3875,4070 3800,4070 ; 4565,3115 4565,3175 4835,3175 4835,3385 4910,3385 4910,3115 4565,3115 ; 4830,3605 4910,3605 4910,3855 4830,3855 4830,3605

## Other copper
Top Layer:
  pour cut-out: 3445,2605 3450,2610 3470,2610 3465,2605 3465,2485 3460,2480 3445,2480
  pour cut-out: 3670,2645 3667.23,2642.23 3667.23,2605.19 3745.19,2605.19 3790,2650 3790,2705 3690,2705 3685,2700
  pour cut-out: 3462.29,2545.25 3474.03,2556.98 3474.03,2709.03 3534.03,2709.03 3595.01,2648.04 3595.01,2599.22 3594.22,2599.22 3514.03,2519.03
  pour cut-out: 3464.65,2807.36 3482.64,2807.36 3485,2805 3485,2860 3480,2855 3460,2855 3460,2820 3455,2815
  pour cut-out: 3393.46,2872.64 3395,2874.17 3395,2935 3540,2935 3545,2940 3545,2895 3519.26,2869.26 3414.26,2869.26 3410,2865
Multi-Layer:
  pour cut-out: 3445,2605 3395,2605 3395,2555 3445,2555
  pour cut-out: 3315,2315 3315,2410 3335,2410 3335,2390 3380,2390 3380,2410 3400,2410 3400,2315

## Dimensions
3630,1075 to 3510,4975 on Mechanical 1
3025,4675 to 6925,4795 on Mechanical 1